# EAGLE board esp8266_01 (EAGLE 7.2.0)
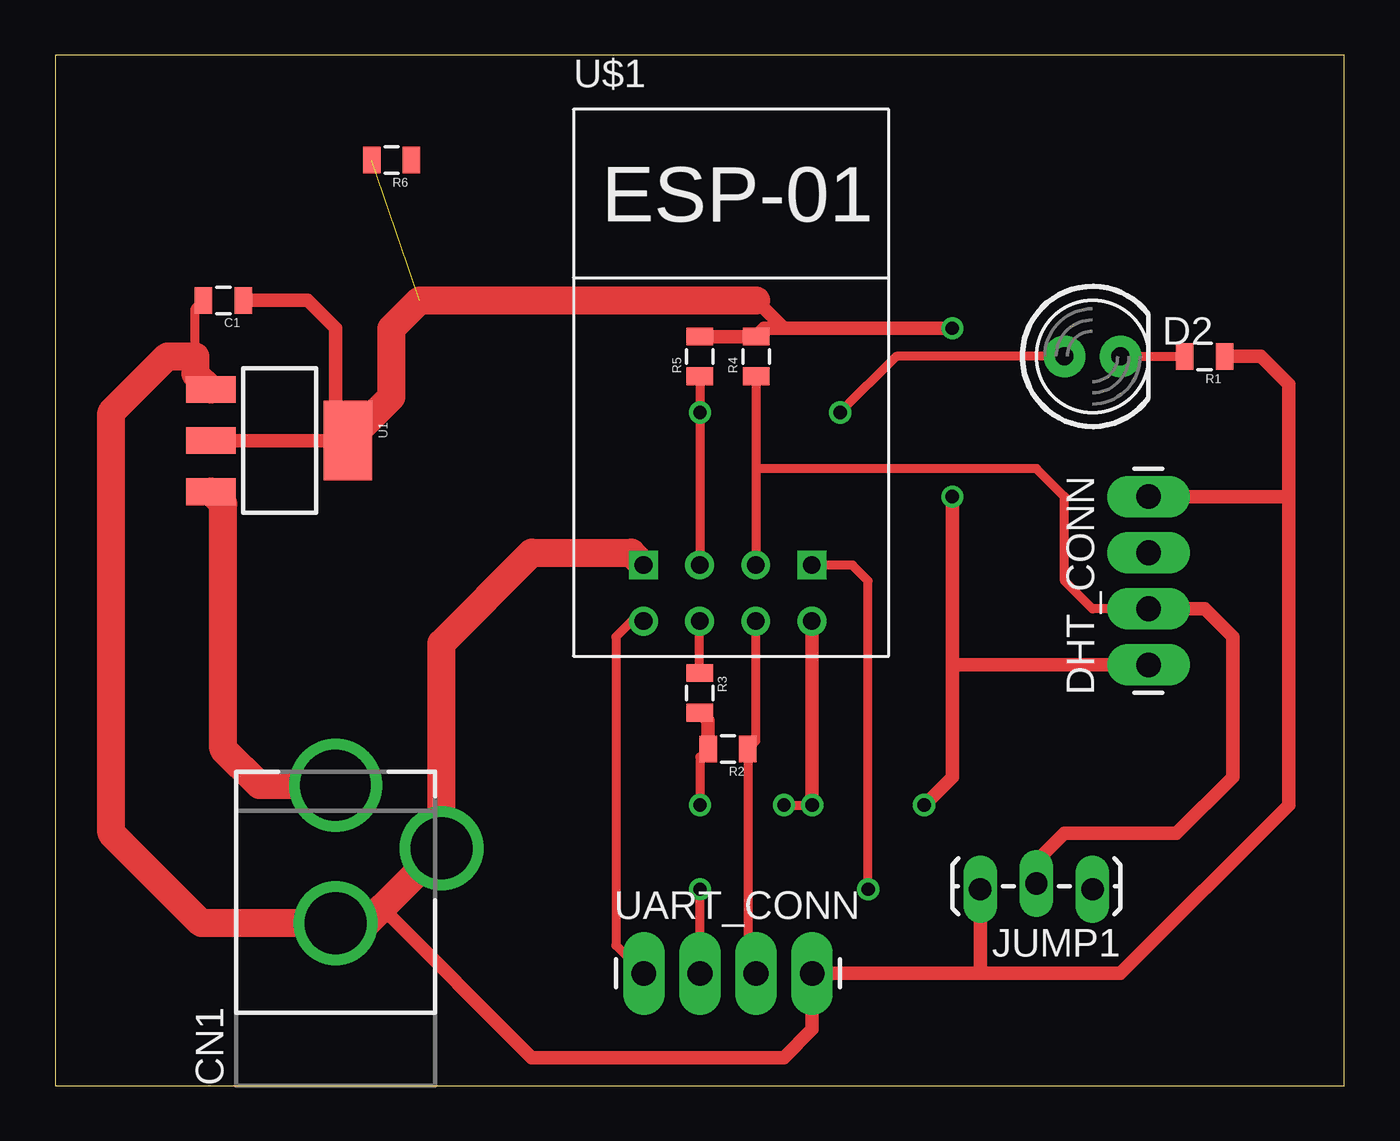
[diagram p0: board, top side]
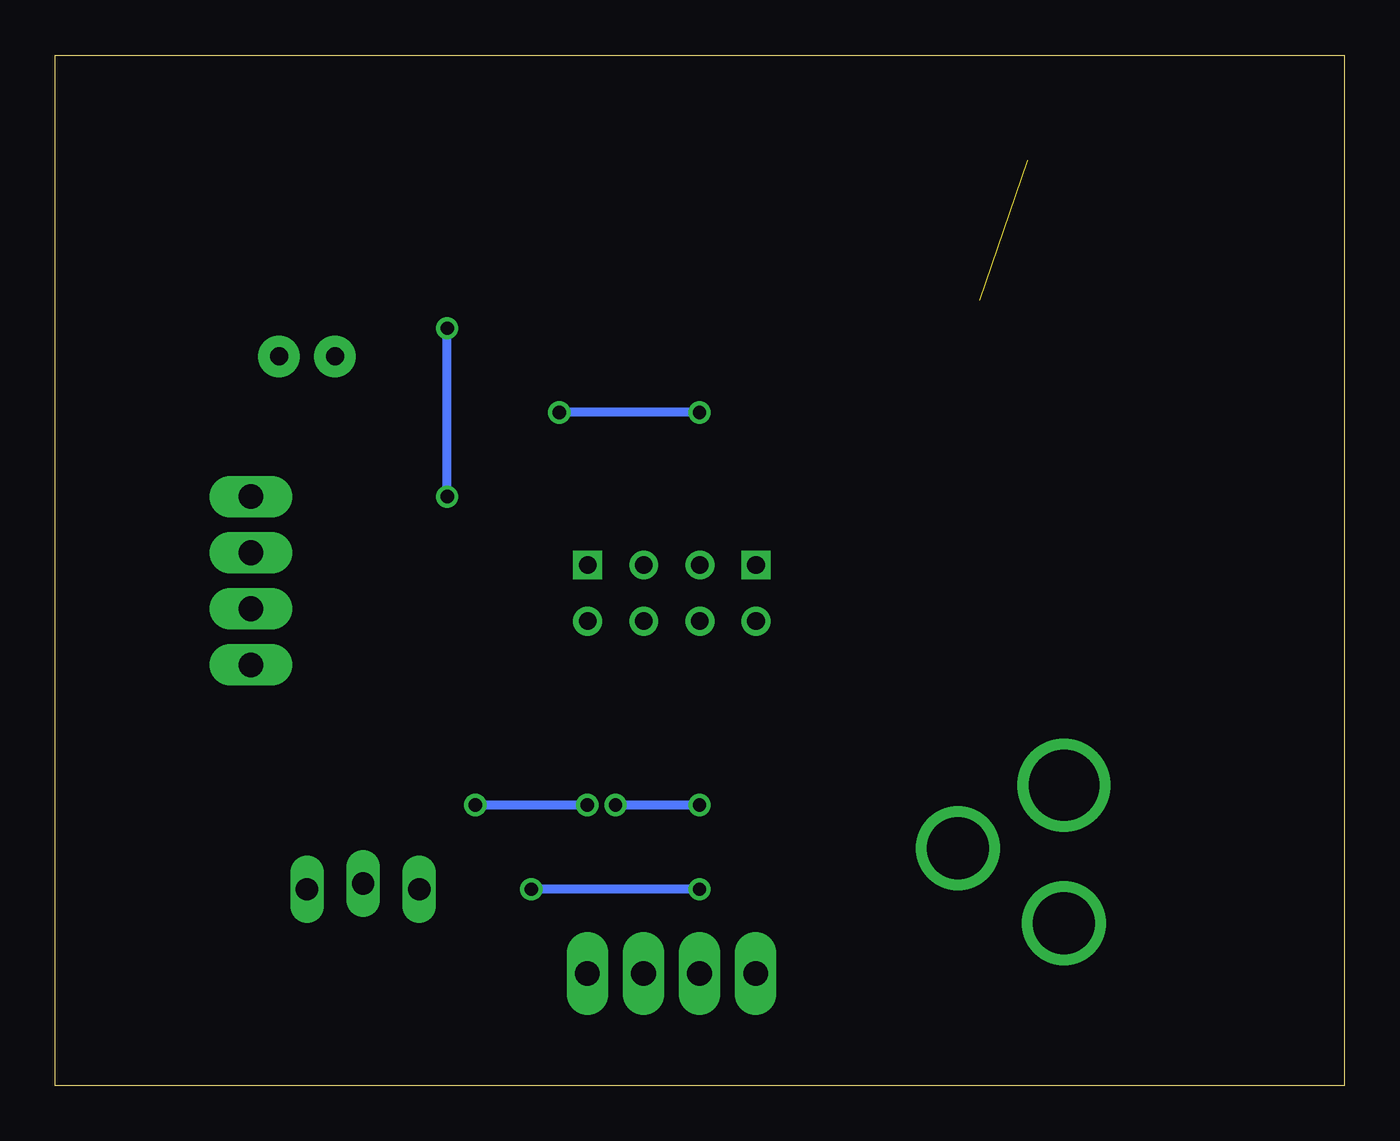
[diagram p1: board, bottom side, seen from below]

Size 58.4 x 46.66 mm. Coordinates in mm from the lower left corner, seen from the top.
Outline: 0,0 58.4,0 58.4,46.66 0,46.66 0,0
Copper layers (1*16): Top 0.035mm / dielectric 1.5mm / Bottom 0.035mm
Design rules "default": minimum track width 10mil, minimum drill 24mil, track to track 8mil, track to pad 8mil, pad to pad 8mil, via to via 8mil, smd to smd 8mil, copper to edge 40mil, drill to drill 8mil, minimum pad ring 10mil, minimum via ring 8mil, stop-mask expansion 4mil, vias tented up to drill 0mil, thermal gap 10mil
Net classes: 0 default: width 0.508 mm, drill 0.254 mm, clearance 0.508 mm

## Footprints (pad centres in the part's own frame; a part is rotated, then mirrored left to right if it is on the bottom)
0805 = smd 0.8 x 1.2: 1 -0.9,0; 2 0.9,0
DCJACK_2MM_PTH = drill 2.8: GND 0,7.35; GNDBREAK 4.8,10.75 | drill 3.2: PWR 0,13.6
LED5MM = drill 0.813 pad 1.88: A -1.27,0; K 1.27,0
1X04_LONGPADS = drill 1.118 pad 1.88 long: 1 0,0; 2 2.54,0; 3 5.08,0; 4 7.62,0
1X03_LOCK_LONGPADS = drill 1.016 long: 1 0,0; 2 2.54,-0.254; 3 5.08,0
SOT223 = smd 1.219 x 2.235: 1 -2.311,-3.099; 2 0,-3.099; 3 2.311,-3.099 | smd 3.6 x 2.2: 4 0,3.099
ESP01 = drill 0.8: CH_PD -1.285,-8.178; GPIO0 1.255,-5.638; GPIO2 -1.285,-5.638; RST 1.255,-8.178; TX -3.825,-8.178; VCC 3.795,-8.178 | drill 0.8 square: GND -3.825,-5.638; RX 3.795,-5.638

## Placement (x,y rotation side)
C1  [0805]  7.62,35.56 180 top
CN1  [DCJACK_2MM_PTH]  12.7,0 0 top
D2  [LED5MM]  46.99,33.02 0 top
DHT_CONN  [1X04_LONGPADS]  49.53,19.05 90 top
JUMP1  [1X03_LOCK_LONGPADS]  46.99,8.89 180 top
R1  100  [0805]  52.07,33.02 180 top
R2  4.7k  [0805]  30.48,15.24 180 top
R3  4.7k  [0805]  29.21,17.78 270 top
R4  4.7k  [0805]  31.75,33.02 90 top
R5  4.7k  [0805]  29.21,33.02 90 top
R6  4.7k  [0805]  15.24,41.91 180 top
U1  [SOT223]  10.16,29.21 270 top
U$1  ESP01  [ESP01]  30.48,29.21 0 top
UART_CONN  [1X04_LONGPADS]  26.67,5.08 0 top

## Library data of the parts
C1 = SparkFun-Capacitors
CN1 = adafruit
D2 = SparkFun-LED
DHT_CONN UART_CONN = SparkFun-Connectors; PROD_ID: CONN-09696
JUMP1 = SparkFun-Connectors
R1-R6 = SparkFun-Resistors
U1 = SparkFun-PowerIC; PROD_ID: VREG-08170
U$1 = esp8266modules

## Nets
3.3V: C1.1 DHT_CONN.1 R2.2 R3.2 R4.2 R5.2 R6.2 U1.2 U1.4 U$1.VCC
CH_PD: R3.1 U$1.CH_PD
GND: C1.2 CN1.GND CN1.GNDBREAK DHT_CONN.4 JUMP1.3 R1.1 U1.1 U$1.GND UART_CONN.4
GPIO0: DHT_CONN.2 JUMP1.2 R4.1 U$1.GPIO0
GPIO2: D2.A R5.1 U$1.GPIO2
N$1: D2.K R1.2
N$3: JUMP1.1
N$6: R6.1
NC: DHT_CONN.3
RESET: R2.1 U$1.RST UART_CONN.3
RX: U$1.RX UART_CONN.2
TX: U$1.TX UART_CONN.1
VCC: CN1.PWR U1.3

## Tracks (layer width: path | path; a pad name or v marks a point on that pad's centre or on a via)
3.3V  (via drill 0.6)  (1 unrouted)
  Top 0.406: R2.2 29.21,14.87 v29.21,12.7 | v33.02,12.7 v34.29,12.7
  Top 0.61: v39.37,12.7 40.64,13.97 40.64,19.05 | 40.64,19.05 v40.64,26.67 | DHT_CONN.1 40.64,19.05 | U$1.VCC 34.29,21.02 v34.29,12.7 | R3.2 29.58,16.51 R2.2 | v40.64,34.29 33.02,34.29 | 33.02,34.29 32.12,34.29 R4.2 R5.2 | 31.75,35.56 33.02,34.29 | U1.2 12.7,29.21 | 12.7,29.21 U1.4 | C1.1 11.43,35.56 12.7,34.29 12.7,29.21
  Top 1.27: U1.4 15.24,31.19 15.24,34.29 16.51,35.56 31.75,35.56
  Bottom 0.406: v29.21,12.7 v33.02,12.7 | v34.29,12.7 v39.37,12.7 | v40.64,26.67 v40.64,34.29
CH_PD
  Top 0.406: R3.1 29.2,18.7 U$1.CH_PD
GND
  Top 0.406: 6.35,33.02 6.35,35.19 C1.2
  Top 0.61: R1.1 54.61,33.02 55.88,31.75 55.88,26.67 | 55.88,26.67 55.88,12.7 48.26,5.08 41.91,5.08 | 41.91,5.08 UART_CONN.4 34.29,2.54 33.02,1.27 21.59,1.27 14.8,8.05 | JUMP1.3 41.91,5.08 | DHT_CONN.4 55.88,26.67
  Top 1.27: U1.1 6.35,32.23 6.35,33.02 5.08,33.02 2.54,30.48 2.54,11.43 6.62,7.35 CN1.GND 14.1,7.35 14.8,8.05 CN1.GNDBREAK 17.5,20.04 21.59,24.13 26.1,24.13 U$1.GND
GPIO0
  Top 0.406: R4.1 31.75,27.94 | 31.75,27.94 31.75,23.59 U$1.GPIO0 | DHT_CONN.2 46.99,21.59 45.72,22.86 45.72,26.67 44.45,27.94 31.75,27.94
  Top 0.61: JUMP1.2 44.45,10.16 45.72,11.43 50.8,11.43 53.34,13.97 53.34,20.32 52.07,21.59 DHT_CONN.2
GPIO2  (via drill 0.6)
  Top 0.406: R5.1 v29.21,30.48 29.21,23.59 U$1.GPIO2 | D2.A 38.1,33.02 v35.56,30.48
  Bottom 0.406: v29.21,30.48 v35.56,30.48
N$1
  Top 0.406: D2.K R1.2
N$2  (via drill 0.6)
  other vias: 29.21,8.89
N$4  (via drill 0.6)
  other vias: 29.21,12.7
N$5  (via drill 0.6)
  other vias: 36.83,8.89
N$7  (via drill 0.6)
  other vias: 39.37,12.7
N$8  (via drill 0.6)
  other vias: 33.02,12.7
N$9  (via drill 0.6)
  other vias: 34.29,12.7
N$10  (via drill 0.6)
  other vias: 40.64,34.29
RESET
  Top 0.406: U$1.RST 31.73,15.6 R2.1 31.38,5.45 UART_CONN.3
RX  (via drill 0.6)
  Top 0.406: UART_CONN.2 v29.21,8.89 | v36.83,8.89 36.83,22.86 36.12,23.57 U$1.RX
  Bottom 0.406: v29.21,8.89 v36.83,8.89
TX
  Top 0.406: U$1.TX 26.11,21.03 25.4,20.32 25.4,6.35 UART_CONN.1
VCC
  Top 1.27: CN1.PWR 9.26,13.6 7.62,15.24 7.62,26.34 U1.3